# EAGLE board untitled (EAGLE 7.3.2)
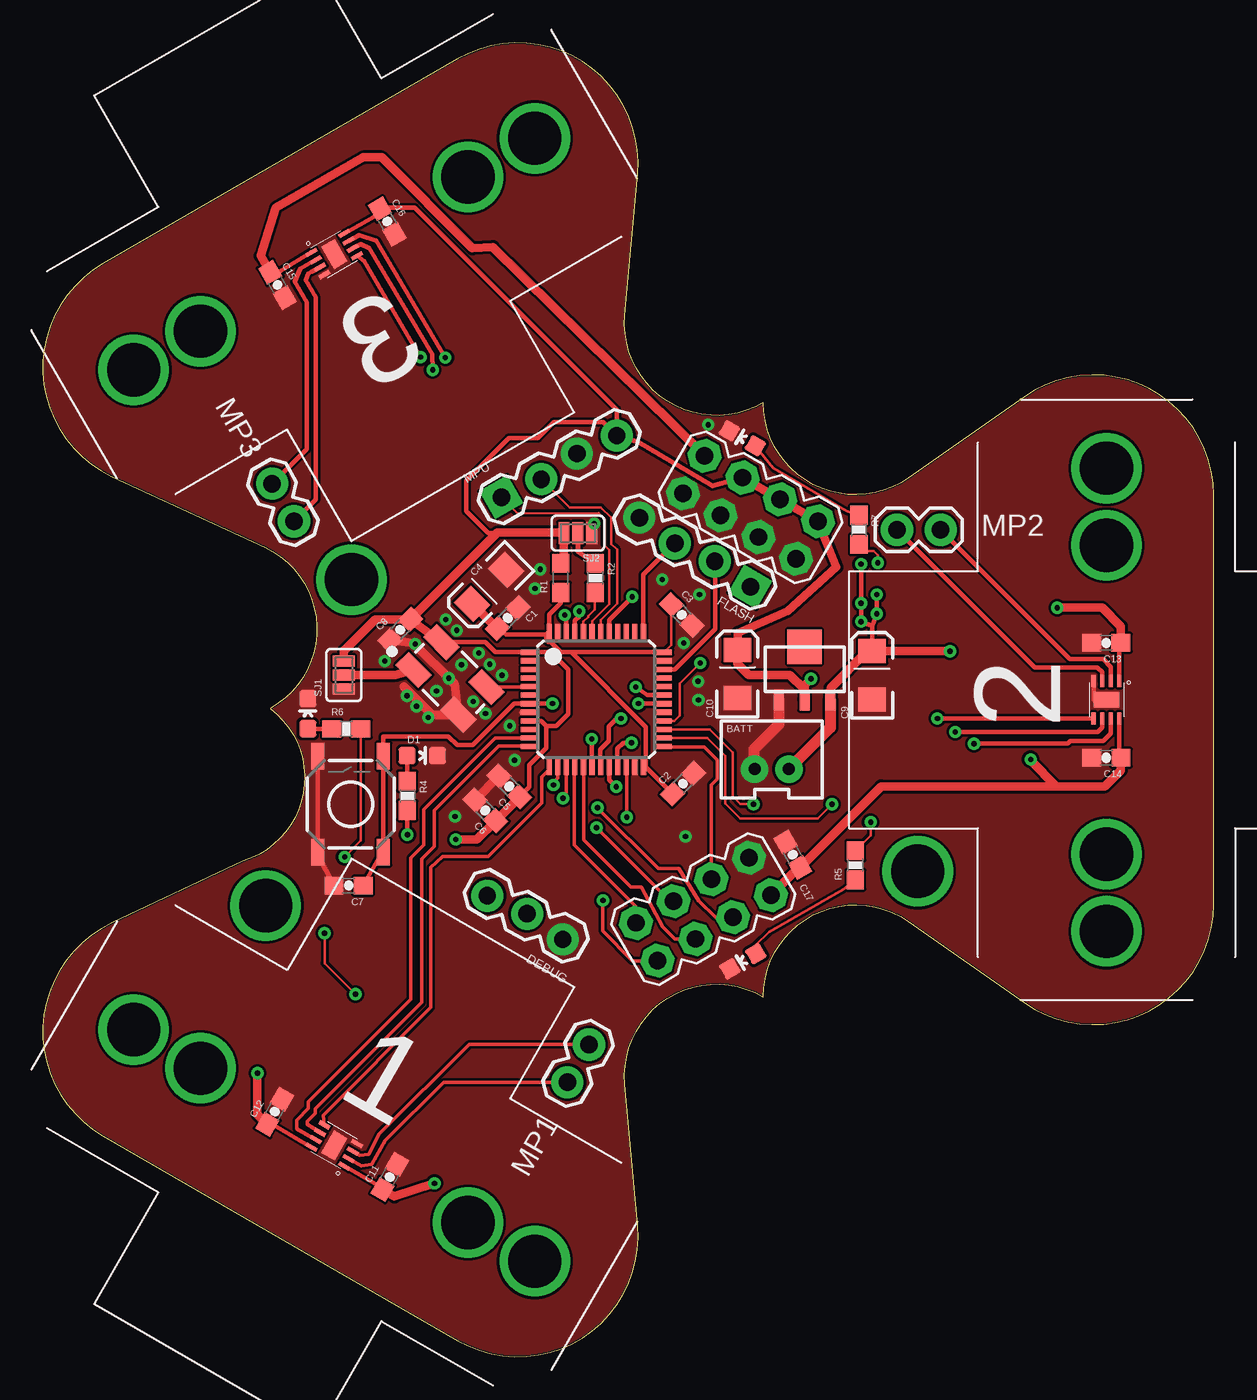
[diagram p0: board, top side]
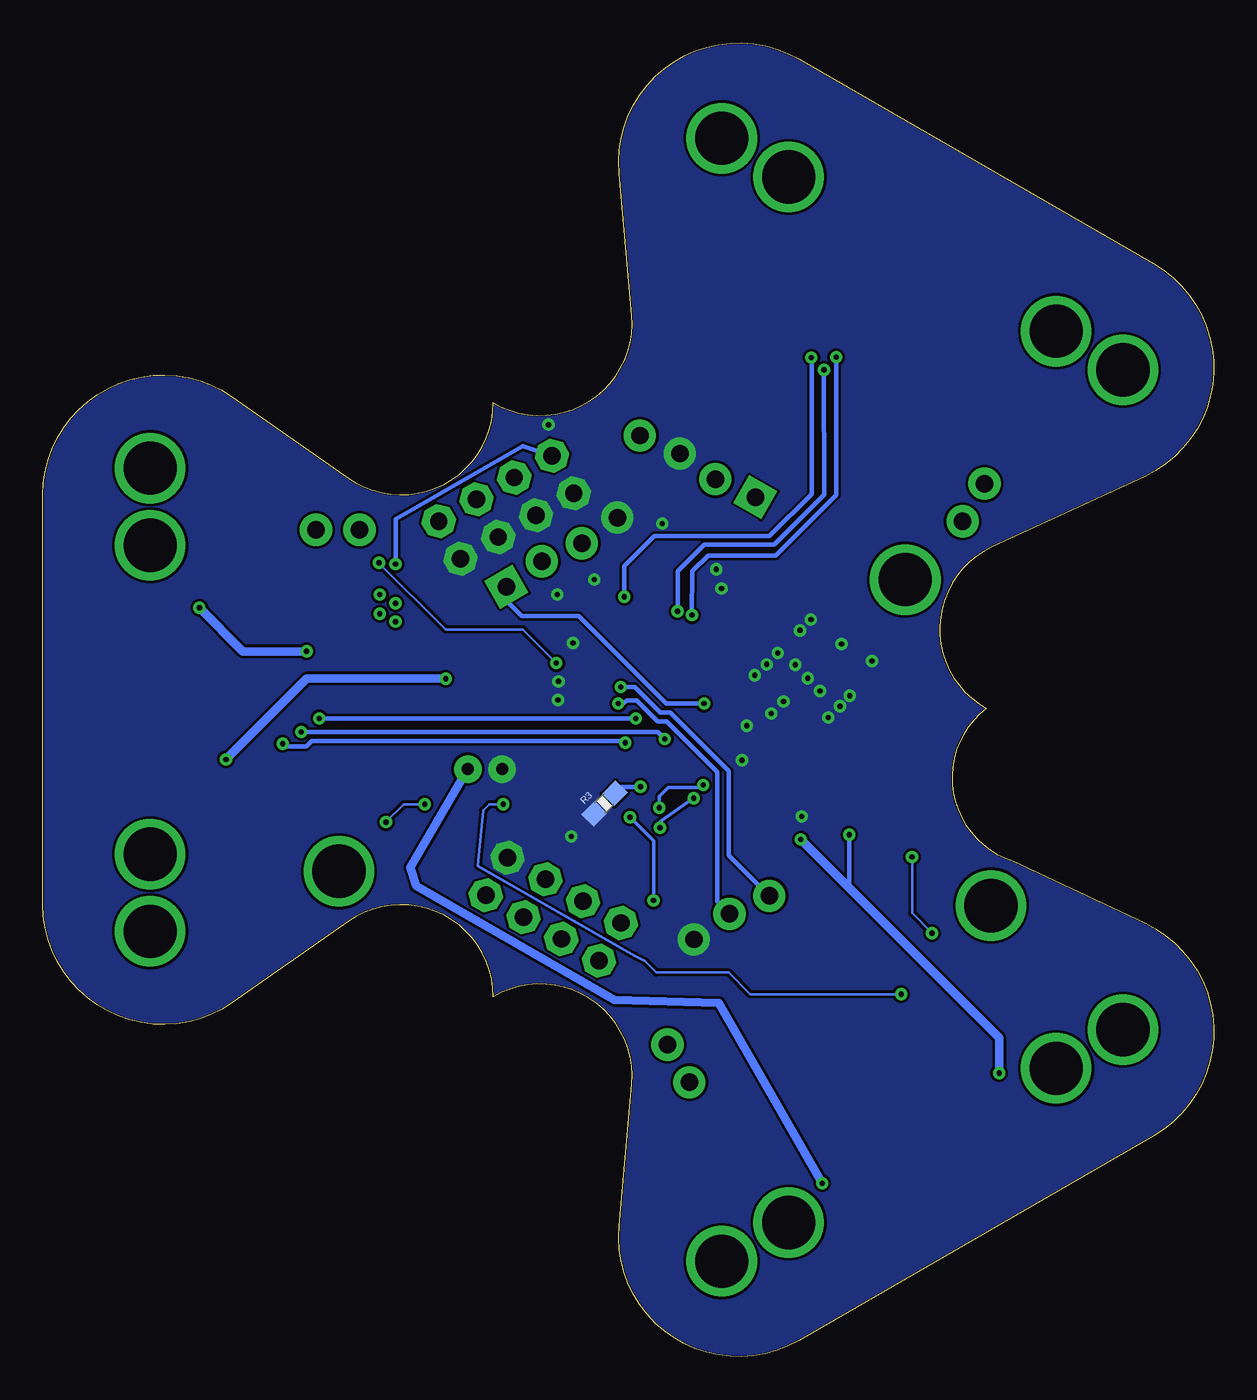
[diagram p1: board, bottom side, seen from below]

Size 68.23 x 76.59 mm. Coordinates in mm from the lower left corner, seen from the top.
Outline: 50.43,25.37 57.22,20.62 arc125 68.23,26.36 68.23,50.23 arc125 57.22,55.96 50.43,51.21 arc-125 41.98,55.61 arc-126 33.91,60.71 34.65,68.96 arc125 24.18,75.65 3.49,63.71 arc125 4,51.32 12.94,47.18 arc-126 13.25,37.79 arc-126 11.67,28.89 4,25.27 arc125 3.49,12.88 24.18,0.93 arc125 34.65,7.62 33.91,15.88 arc-126 41.98,20.97 arc-125 50.43,25.37
Copper layers (1*16): Top 0.035mm / dielectric 1.5mm / Bottom 0.035mm
Design rules "default *": minimum track width 6mil, minimum drill 12mil, track to track 6mil, track to pad 6mil, pad to pad 6mil, via to via 6mil, smd to smd 6mil, copper to edge 3mil, drill to drill 6mil, minimum pad ring 10mil, minimum via ring 8mil, stop-mask expansion 4mil, vias tented up to drill 12mil, thermal gap 10mil

## Footprints (pad centres in the part's own frame; a part is rotated, then mirrored left to right if it is on the bottom)
JST-2-PTH-VERT = drill 0.7 pad 1.6: 1 -1,-0.55; 2 1,-0.55
0603-CAP = smd 1.1 x 1: 1 -0.85,0; 2 0.85,0
EIA3216 = smd 1.4 x 1.6: A 1.4,0; C -1.4,0
LED-0603 = smd 1 x 1: A 0,-0.877; C 0,0.877
1X03_LOCK = drill 1.016 pad 1.88: 1 0,0.127; 2 2.54,-0.127; 3 5.08,0.127
1X04_LOCK = drill 1.016 pad 1.88 square: 1 0,0.127 | drill 1.016 pad 1.88: 2 2.54,-0.127; 3 5.08,0.127; 4 7.62,-0.127
N20 = drill 3.1: P$1 -9,0; P$2 9,0; P$3 -13.5,0; P$4 13.5,0
PWSON-N8 = smd 0.25 x 0.7: P$1 0.75,1.1; P$2 0.25,1.1; P$3 -0.25,1.1; P$4 -0.75,1.1; P$5 -0.75,-1.1; P$6 -0.25,-1.1; P$7 0.25,-1.1; P$8 0.75,-1.1 | smd 1.5 x 0.9: P$9 0,0
1X02 = drill 1.016 pad 1.88: 1 0,0; 2 2.54,0
2X4 = drill 1.016 pad 1.88 octagon: 1 -3.81,-1.27; 2 -3.81,1.27; 3 -1.27,-1.27; 4 -1.27,1.27; 5 1.27,-1.27; 6 1.27,1.27; 7 3.81,-1.27; 8 3.81,1.27
0603 = smd 1.1 x 1: 1 -0.85,0; 2 0.85,0
0603-RES = smd 1.1 x 1: 1 -0.85,0; 2 0.85,0
TACTILE-SWITCH-SMD = smd 1.524 x 0.762: 1 -2.794,1.905; 2 2.794,1.905; 3 -2.794,-1.905; 4 2.794,-1.905
PAD-JUMPER-3-NC_BY_PASTE_YES_SILK_FULL_BOX = smd 0.635 x 1.27: 1 -0.813,0; 2 0,0; 3 0.813,0
CRYSTAL-OSC-SMD-5X3 = smd 1.9 x 1.1: 1 -1.85,-1.15; 2 1.85,-1.15; 3 1.85,1.15; 4 -1.85,1.15
LQFP48-7X7 = smd 0.9 x 0.3: 1 -3.95,2.75; 2 -3.95,2.25; 3 -3.95,1.75; 4 -3.95,1.25; 5 -3.95,0.75; 6 -3.95,0.25; 7 -3.95,-0.25; 8 -3.95,-0.75; 9 -3.95,-1.25; 10 -3.95,-1.75; 11 -3.95,-2.25; 12 -3.95,-2.75; 25 3.95,-2.75; 26 3.95,-2.25; 27 3.95,-1.75; 28 3.95,-1.25; 29 3.95,-0.75; 30 3.95,-0.25; 31 3.95,0.25; 32 3.95,0.75; 33 3.95,1.25; 34 3.95,1.75; 35 3.95,2.25; 36 3.95,2.75 | smd 0.3 x 0.9: 13 -2.75,-3.95; 14 -2.25,-3.95; 15 -1.75,-3.95; 16 -1.25,-3.95; 17 -0.75,-3.95; 18 -0.25,-3.95; 19 0.25,-3.95; 20 0.75,-3.95; 21 1.25,-3.95; 22 1.75,-3.95; 23 2.25,-3.95; 24 2.75,-3.95; 37 2.75,3.95; 38 2.25,3.95; 39 1.75,3.95; 40 1.25,3.95; 41 0.75,3.95; 42 0.25,3.95; 43 -0.25,3.95; 44 -0.75,3.95; 45 -1.25,3.95; 46 -1.75,3.95; 47 -2.25,3.95; 48 -2.75,3.95
SOT89 = smd 0.58 x 1.2: 1 -1.5,-1.8; 2 0,-1.8; 3 1.5,-1.8 | smd 2 x 2: 4 0,1.3

## Placement (x,y rotation side)
BATT  [JST-2-PTH-VERT]  42.47,34.8 0 top
C1  0.1uF  [0603-CAP]  27.09,43.06 45 top
C2  0.1uF  [0603-CAP]  37.3,33.4 45 top
C3  0.1uF  [0603-CAP]  37.23,43.24 315 top
C4  10uF  [EIA3216]  26,44.89 225 top
C5  10nF  [0603-CAP]  27.18,33.24 135 top
C6  1nF  [0603-CAP]  25.79,31.84 135 top
C7  0.1uF  [0603-CAP]  17.81,27.46 180 top
C8  0.1uF  [0603-CAP]  20.82,42.37 45 top
C9  105 1uF  [EIA3216]  48.33,39.72 90 top
C10  225 2.2uF  [EIA3216]  40.47,39.8 90 top
C11  0.1uF  [0603-CAP]  20.21,10.47 60 top
C12  0.1uF  [0603-CAP]  13.5,14.27 60 top
C13  0.1uF  [0603-CAP]  61.97,41.61 180 top
C14  0.1uF  [0603-CAP]  61.98,34.91 180 top
C15  0.1uF  [0603-CAP]  13.67,62.47 300 top
C16  0.1uF  [0603-CAP]  20.06,66.17 300 top
C17  0.1uF  [0603-CAP]  43.71,29.26 120 top
D1  GREEN  [LED-0603]  22.11,35.04 270 top
D2  BLUE  [LED-0603]  40.79,23.05 120 top
D3  BLUE  [LED-0603]  15.44,37.48 0 top
D4  BLUE  [LED-0603]  40.76,53.53 60 top
DEBUG  [1X03_LOCK]  30.36,24.43 150 top
FLASH  [1X04_LOCK]  41.29,44.99 150 top
M$1  N20  [N20]  61.98,38.29 90 top
M$2  N20  [N20]  16.98,64.27 210 top
M$3  N20  [N20]  16.98,12.31 330 top
MD1  DRV8837  [PWSON-N8]  16.98,12.31 240 top
MD2  DRV8837  [PWSON-N8]  61.98,38.29 0 top
MD3  DRV8837  [PWSON-N8]  16.98,64.27 120 top
MP1  [1X02]  31.83,18.19 240 top
MP2  [1X02]  49.78,48.19 0 top
MP3  [1X02]  14.63,48.69 120 top
MPU  [1X04_LOCK]  26.78,49.99 30 top
NRF24L01+  [2X4]  38.49,26.09 210 top
POWER  [2X4]  41.23,49.51 330 top
R1  0  [0603]  30.18,45.4 90 top
R2  10K  [0603-RES]  32.18,45.4 270 top
R3  10K  [0603-RES]  35.5,32.24 45 bottom
R4  220  [0603-RES]  21.23,32.69 270 top
R5  220  [0603-RES]  47.35,28.64 90 top
R6  220  [0603-RES]  17.68,36.6 0 top
R7  220  [0603-RES]  47.56,48.21 270 top
S1  SWITCH-MOMENTARY-2SMD-REDUNDANT  [TACTILE-SWITCH-SMD]  17.93,32.2 90 top
SJ1  JUMPER-PAD-3-NC_BY_PASTE  [PAD-JUMPER-3-NC_BY_PASTE_YES_SILK_FULL_BOX]  17.54,39.73 90 top
SJ2  JUMPER-PAD-3-NC_BY_PASTE  [PAD-JUMPER-3-NC_BY_PASTE_YES_SILK_FULL_BOX]  31.18,48 180 top
U2  OSCILLATOR5X3-PIN1-INDICATED  [CRYSTAL-OSC-SMD-5X3]  23.72,39.53 315 top
U$1  STM32F103C8T6  [LQFP48-7X7]  32.25,38.31 0 top
U$2  [SOT89]  44.39,40.08 0 top

## Library data of the parts
BATT DEBUG FLASH MP1-MP3 MPU NRF24L01+ POWER = SparkFun-Connectors
C1-C3 C7 C8 C11-C17 = SparkFun-Capacitors; PROD_ID: CAP-08604
C4 C9 C10 = SparkFun-Capacitors; PROD_ID: CAP-00811
C5 = SparkFun-Capacitors; PROD_ID: CAP-00867
C6 = SparkFun-Capacitors; PROD_ID: CAP-07886
D1 = SparkFun-LED; PROD_ID: DIO-00821
D2-D4 = SparkFun-LED; PROD_ID: DIO-08575
M$1-M$3 MD1-MD3 U$2 = User-Submitted
R1 = SparkFun-Resistors; PROD_ID: RES-08609
R2 R3 = SparkFun-Resistors; PROD_ID: RES-00824
R4-R7 = SparkFun-Resistors; PROD_ID: RES-07861
S1 = SparkFun-Electromechanical; PROD_ID: SWCH-08247
SJ1 SJ2 = SparkFun-Passives
U2 = SparkFun-FreqCtrl
U$1 = st-microelectronics

## Nets
3.3V: C5.1 C6.1 C8.2 C10.A C12.1 C14.1 C16.1 C17.1 MD1.P$8 MD2.P$8 MD3.P$8 MPU.4 NRF24L01+.2 POWER.4 POWER.6 POWER.8 R1.2 R4.2 SJ1.3 SJ2.3 U2.4 U$1.1 U$1.9 U$2.2
5V: BATT.2 C9.A C11.1 C13.1 C15.1 MD1.P$1 MD2.P$1 MD3.P$1 POWER.2 U$2.3
CLK_16M: U2.3 U$1.5
GND: BATT.1 C1.2 C2.2 C3.2 C4.C C5.2 C6.2 C7.2 C8.1 C9.C C10.C C11.2 C12.2 C13.2 C14.2 C15.2 C16.2 C17.2 D1.C D2.C D3.C D4.C DEBUG.1 FLASH.4 MD1.P$4 MD1.P$9 MD2.P$4 MD2.P$9 MD3.P$4 MD3.P$9 MPU.3 NRF24L01+.1 POWER.1 POWER.3 POWER.5 POWER.7 R3.1 S1.1 S1.2 SJ1.1 SJ2.1 U2.2 U$1.8 U$1.23 U$1.35 U$1.47 U$2.1
I2C1_SCL: MPU.2 U$1.42
I2C1_SDA: MPU.1 U$1.43
LED1: R5.2 U$1.26
LED2: R6.2 U$1.27
LED3: R7.2 U$1.28
M1_SLEEP: MD1.P$7 U$1.11
M2_SLEEP: MD2.P$7 U$1.21
M3_SLEEP: MD3.P$7 U$1.41
N$1: SJ1.2 U2.1
N$2: R3.2 U$1.20
N$3: R2.1 SJ2.2
N$4: C1.1 C2.1 C3.1 C4.A R1.1 U$1.24 U$1.36 U$1.48
N$5: R2.2 U$1.44
N$6: MD1.P$2 MP1.2
N$7: MD1.P$3 MP1.1
N$11: D1.A R4.1
N$12: D2.A R5.1
N$13: MD2.P$2 MP2.2
N$14: MD2.P$3 MP2.1
N$15: D3.A R6.1
N$16: D4.A R7.1
N$17: MD3.P$2 MP3.2
N$18: MD3.P$3 MP3.1
NRF_CE: NRF24L01+.3 U$1.25
NRF_CSN: NRF24L01+.4 U$1.14
NRF_IRQ: NRF24L01+.8 U$1.22
NRST: C7.1 FLASH.1 S1.3 S1.4 U$1.7
SPI1_MISO: NRF24L01+.7 U$1.16
SPI1_MOSI: NRF24L01+.6 U$1.17
SPI1_SCK: NRF24L01+.5 U$1.15
SWCLK: FLASH.3 U$1.37
SWDIO: FLASH.2 U$1.34
TIM2_CH3: MD1.P$6 U$1.12
TIM2_CH4: MD1.P$5 U$1.13
TIM3_CH3: MD2.P$6 U$1.18
TIM3_CH4: MD2.P$5 U$1.19
TIM4_CH3: MD3.P$6 U$1.45
TIM4_CH4: MD3.P$5 U$1.46
USART1_CTS: U$1.32
USART1_RTS: U$1.33
USART1_RX: DEBUG.3 U$1.31
USART1_TX: DEBUG.2 U$1.30

## Tracks (layer width: path | path; a pad name or v marks a point on that pad's centre or on a via)
3.3V  (via drill 0.3)
  Top 0.203: MD1.P$8 13.62,13.38 C12.1
  Top 0.254: MD2.P$8 62.73,34.91 C14.1 | MD3.P$8 19.31,66.47 C16.1 19.7,66.98 21.67,66.98 33.44,55.21 MPU.4 32.66,54.48 29.78,54.48 28.84,53.54 27.13,53.54 24.67,51.07 24.67,49.3 25.96,48 SJ2.3 | U$1.9 29.05,37.06 29.34,36.77 | 29.34,36.77 29.34,35.48 28.35,34.49 28.35,33.22 C5.1 | U2.4 25.78,41.65 26.37,41.07 U$1.1 29.6,41.06 30.61,40.05 30.61,37.46 29.93,36.77 29.34,36.77 | R4.2 v21.23,30.43 v21.24,30.42
  Top 0.305: SJ2.3 30.37,46.13 R1.2 | MPU.4 34.65,53.34 39.02,50.77 POWER.4
  Top 0.508: POWER.4 POWER.6 POWER.8 46.23,46.02 43.42,43.48 40.49,42.18 C10.A 40.47,40.41 41.13,39.75 43.52,39.75 44.36,38.91 44.36,38.31 U$2.2 44.39,39.14 v44.76,39.52 | C8.2 U2.4 | C8.2 19.36,42.97 17.53,41.14 SJ1.3 | C5.1 C6.1 25.29,30.15 v24.06,30.15 | 30.37,46.13 SJ2.3 30.33,48.03 26.47,48.03 C8.2 | 59.06,33.24 48.85,33.24 C17.1 44.05,28.52 NRF24L01+.2 | 59.06,33.24 61.88,33.24 62.82,34.18 C14.1 | v12.5,16.53 12.5,14.11 C12.1 | v57.56,34.82 57.56,34.74 59.06,33.24
  Bottom 0.254: v21.24,30.42 21.24,27.33 21.04,27.12
  Bottom 0.508: v24.06,30.15 21.04,27.12 12.5,18.59 v12.5,16.53 | v44.76,39.52 52.86,39.52 v57.56,34.82
5V  (via drill 0.3)
  Top 0.203: MD1.P$1 19.36,10.08 C11.1
  Top 0.254: MD2.P$1 62.73,41.61 C13.1 | 48.34,42.59 48.34,41.14 C9.A | MD3.P$1 13.82,63.29 C15.1 | 48.34,42.59 v47.68,42.85 v47.68,43.91 v47.68,46.2 | 48.34,42.59 v48.6,43.3 v48.6,44.42
  Top 0.508: C9.A 48.04,41.12 45.9,38.98 45.9,38.3 U$2.3 | 48.34,41.14 52.84,41.14 v52.86,41.12 | v59.11,43.66 61.73,43.66 62.82,42.57 C13.1 | v22.82,10.1 20.48,9.34 C11.1 | POWER.2 26.22,64.69 25.03,64.61 19.74,69.92 18.68,69.92 13.57,66.98 12.68,64.18 C15.1
  Top 0.635: U$2.3 45.89,36.67 BATT.2
  Bottom 0.254: POWER.2 40.27,53.08 47.66,48.84 47.68,48.81 v47.68,46.2
  Bottom 0.508: v52.86,41.12 56.57,41.12 v59.11,43.66 | BATT.2 46.82,28.52 46.49,27.45 34.93,20.8 28.84,20.62 v22.82,10.1
CLK_16M
  Top 0.203: U$1.5 28.28,39.04 U2.3
GND  (via drill 0.3)
  Top 0.254: MD2.P$4 61.23,38.29 MD2.P$9 | S1.2 S1.1 16.03,29.28 C7.2 | U$1.8 27.87,37.56
  Top 0.508: C8.1 21.57,41.6 24.01,39.21 U2.2 22.69,37.41 21.04,39.06 | C5.2 C6.2
  Top 0.635: U$2.1 42.89,36.86 41.43,35.4 41.43,34.29 BATT.1
  other vias: 23.48,42.97 24.11,42.34 25.41,41.02 26.04,40.36 26.75,39.72 25.08,38.2 25.79,37.49 22.46,37.26 21.77,37.92 21.22,38.53 22.94,38.81 24.39,40.33 21.7,41.55 19.92,40.56 23.65,39.54 27.21,36.77 27.49,34.77 24.01,31.49 38.21,38.27 38.18,39.37 37.35,41.6 38.26,44.42 36.1,45.31 28.68,44.78 28.99,45.89 37.45,30.32 32.14,48.56 38.77,54.33
  pour Top (no thermals): -8.68,-2.19 71.25,-2.19 71.25,77.67 -8.68,77.67
  pour Bottom (no thermals): -3.24,-0.92 76.69,-0.92 76.69,78.94 -3.24,78.94
I2C1_SCL
  Top 0.152: U$1.42 32.5,42.95 33.46,43.91 33.46,47.04 33.13,47.37 33.13,48.92 32.52,49.5 30.7,49.5 MPU.2
I2C1_SDA
  Top 0.152: U$1.43 32,42.89 33,43.89 33,47.01 32.75,47.29 32.75,48.81 32.39,49.17 27.68,49.14 MPU.1
LED1  (via drill 0.3)
  Top 0.152: U$1.26 38.72,36.06 39.76,35.02 39.76,32.25 40.65,31.36 45.14,31.36 v45.98,32.2 | v48.24,31.16 48.24,30.39 R5.2
  Bottom 0.152: v45.98,32.2 47.2,32.2 v48.24,31.16
LED2  (via drill 0.3)
  Top 0.152: R6.2 18.53,30.08 v17.58,29.13 | v16.42,24.68 16.42,22.93 v18.22,21.13 | U$1.27 38.85,36.56 40.19,35.23 40.19,32.69 40.65,32.23 41.38,32.23 v41.41,32.2
  Bottom 0.152: v17.58,29.13 17.58,25.85 v16.42,24.68 | v18.22,21.13 27.01,21.13 28.28,22.4 32.49,22.4 33.15,23.06 33.74,23.36 42.88,28.6 42.58,31.85 42.22,32.2 v41.41,32.2
LED3  (via drill 0.3)
  Top 0.152: U$1.28 36.8,37.06 37.12,37.38 37.12,39.24 v38.31,40.43 | v48.65,46.27 48.65,46.73 48.42,46.96 47.95,46.96 R7.2
  Bottom 0.152: v38.31,40.43 40.27,42.39 44.76,42.39 v48.65,46.27
M1_SLEEP
  Top 0.203: U$1.11 26.35,36.06 22.18,31.9 22.18,29.81 21.44,29.08 21.44,20.82 15.48,14.85 15.48,14.47 14.79,13.79 14.79,13.28 MD1.P$7
M2_SLEEP  (via drill 0.3)
  Top 0.254: MD2.P$7 62.23,36.34 61.78,35.89 59.87,35.89 59.72,35.73 v54.26,35.73 | v34.3,35.78 33.81,35.78 33.48,35.45 33.48,34.38 U$1.21
  Bottom 0.254: v34.3,35.78 34.42,35.89 52.56,35.89 52.89,35.56 54.08,35.56 v54.26,35.73
M3_SLEEP  (via drill 0.3)
  Top 0.254: U$1.41 33,42.95 v34.35,44.29 | v23.45,58.24 19.44,65.07 18.42,65.37 MD3.P$7
  Bottom 0.254: v34.35,44.29 34.35,46.1 32.6,47.85 25.91,47.85 23.43,50.29 23.43,58.21 v23.45,58.24
N$1
  Top 0.508: SJ1.2 20.53,39.75 U2.1
N$2  (via drill 0.3)
  Top 0.254: U$1.20 33,33.63 v33.41,33.22
  Bottom 0.254: v33.41,33.22 34.53,33.22 R3.2
N$3
  Top 0.305: SJ2.2 31.18,46.94 R2.1
N$4
  Top 0.152: C3.1 36.63,41.49 U$1.36
  Top 0.254: U$1.24 35.14,34.36 | 35.14,34.36 C2.1 | U$1.36 30.79,41.06 | 30.79,41.06 30.19,41.06 29.6,41.65 29.45,41.65 29.34,41.75 29.34,42.11 | 29.34,42.11 U$1.48 29.5,43.25 30.18,43.94 R1.1 | 35.14,34.36 35.14,36.72 30.79,41.06 | 29.34,42.11 27.01,42.11 C1.1
  Top 0.508: C1.1 26.44,42.46 C4.A
N$5
  Top 0.152: U$1.44 31.5,42.84 31.78,43.12 31.78,43.18 32.16,43.56 32.16,44.53 R2.2
N$6
  Top 0.203: MD1.P$2 18.55,11.12 19.16,11.2 19.95,12.59 23.35,15.99 MP1.2
N$7
  Top 0.203: MD1.P$3 18.47,11.73 18.98,11.81 19.62,12.97 24.83,18.19 MP1.1
N$8  (via drill 3.1)
  other vias: 17.98,45.29
N$9  (via drill 3.1)
  other vias: 50.98,28.29
N$10  (via drill 3.1)
  other vias: 12.98,26.29
N$11
  Top 0.254: D1.A R4.1
N$12
  Top 0.152: D2.A 41.55,23.99 42.32,24.76 46.64,27.22 R5.1
N$13
  Top 0.254: MD2.P$2 62.23,40.21 61.78,40.66 59.85,40.66 MP2.2
N$14
  Top 0.254: MD2.P$3 61.73,39.9 61.45,40.18 57.8,40.18 MP2.1
N$15
  Top 0.254: D3.A 16.8,36.6 R6.1
N$16
  Top 0.152: D4.A 42.55,51.81 46.84,49.3 R7.1
N$17
  Top 0.254: MD3.P$2 14.99,63.42 14.69,62.66 15.37,61.46 15.37,52.91 MP3.2
N$18
  Top 0.254: MD3.P$3 15.68,63.24 15.48,63.14 15.32,62.76 15.91,61.77 15.91,49.97 MP3.1
NRF_CE
  Top 0.203: NRF24L01+.3 38.95,33.33 39.3,33.68 39.3,34.77 38.54,35.53 36.23,35.53 U$1.25
NRF_CSN  (via drill 0.3)
  Top 0.203: NRF24L01+.4 39.17,25.62 38.23,26.56 37.07,28.47 35.85,28.47 v32.32,32 | v29.75,33.32 29.75,33.47 30,33.73 U$1.14
  Bottom 0.203: v32.32,32 32.32,32.66 31.78,33.19 29.88,33.19 v29.75,33.32
NRF_IRQ  (via drill 0.3)
  Top 0.203: NRF24L01+.8 34.35,23.08 32.62,24.81 32.62,26.56 v32.65,26.59 | v34.02,31.44 34.02,34.35 U$1.22
  Bottom 0.203: v32.65,26.59 32.65,30.07 v34.02,31.44
NRST  (via drill 0.3)
  Top 0.254: 19.84,36.16 23.63,36.16 24.14,35.66 25.05,35.66 27.46,38.07 28,38.07 28,38.06 U$1.7 29.67,38.09 v29.7,38.07 | 19.84,36.16 S1.4 | 19.84,36.16 19.84,30.58 S1.3 19.84,29.52 C7.1
  Bottom 0.254: FLASH.1 41.23,44.09 40.32,43.18 37.01,43.18 31.91,38.07 v29.7,38.07
SPI1_MISO
  Top 0.203: NRF24L01+.7 34.55,26.23 30.97,29.81 30.97,34.33 U$1.16
SPI1_MOSI
  Top 0.203: NRF24L01+.6 36.81,24.35 36.13,25.04 34.86,27.38 34.27,27.38 31.53,30.12 31.53,34.34 U$1.17
SPI1_SCK  (via drill 0.3)
  Top 0.203: NRF24L01+.5 36.54,26.55 v32.26,30.83 | v30.31,32.56 30.51,32.89 30.51,34.35 U$1.15
  Bottom 0.203: v32.26,30.83 32.26,31.19 v30.31,32.56
SWCLK
  Top 0.254: U$1.37 35,45.59 FLASH.3
SWDIO
  Top 0.254: U$1.34 36.82,40.06 39.17,42.41 39.17,46.35 FLASH.2
TIM2_CH3
  Top 0.203: U$1.12 28.35,35.61 26.58,35.61 22.82,31.85 22.82,29.74 22.08,29 22.08,20.65 15.88,14.45 15.88,14.19 15.4,13.71 15.4,13.53 MD1.P$6
TIM2_CH4
  Top 0.203: U$1.13 29.5,34.24 29.06,33.8 29.06,32.28 25.94,29.15 23.3,29.15 22.61,28.52 22.61,20.37 16.35,14.05 MD1.P$5
TIM3_CH3  (via drill 0.3)
  Top 0.254: MD2.P$6 61.73,36.67 61.47,36.42 v53.17,36.42 | v31.99,36.01 31.99,34.38 U$1.18
  Bottom 0.254: v53.17,36.42 32.39,36.42 v31.99,36.01
TIM3_CH4  (via drill 0.3)
  Top 0.254: MD2.P$5 v52.14,37.19 v52.13,37.21 | v33.69,37.21 33.43,37.21 32.98,36.75 32.98,35.89 32.49,35.4 U$1.19
  Bottom 0.254: v52.13,37.21 v33.69,37.21
TIM4_CH3  (via drill 0.3)
  Top 0.254: U$1.45 31,42.9 31.25,43.15 v31.25,43.45 | MD3.P$6 18.52,64.84 19.01,64.61 22.69,58.44 v22.71,57.53
  Bottom 0.254: v31.25,43.45 31.25,45.79 29.7,47.34 25.61,47.34 22.69,50.26 v22.71,57.53
TIM4_CH4  (via drill 0.3)
  Top 0.254: U$1.46 30.5,43.04 v30.41,43.23 | v22,58.26 18.73,63.85 MD3.P$5
  Bottom 0.254: v30.41,43.23 30.39,45.79 29.47,46.71 25.53,46.71 22,50.24 v22,58.26
USART1_RX  (via drill 0.3)
  Top 0.254: U$1.31 35.23,38.56 v34.55,39.04
  Bottom 0.254: v34.55,39.04 33.74,39.04 32.26,37.56 31.68,37.56 28.25,34.13 28.25,29.21 DEBUG.3
USART1_TX  (via drill 0.3)
  Top 0.254: U$1.30 v34.71,38.06 v34.7,38.07
  Bottom 0.254: v34.7,38.07 34.4,38.07 34.22,38.25 33.61,38.25 32.39,37.03 31.88,37.03 28.94,34.08 28.94,26.52 DEBUG.2

## Text on the board
tNames: 3 | 2 | 1